# EAGLE board Display4s (EAGLE 9.6.2)
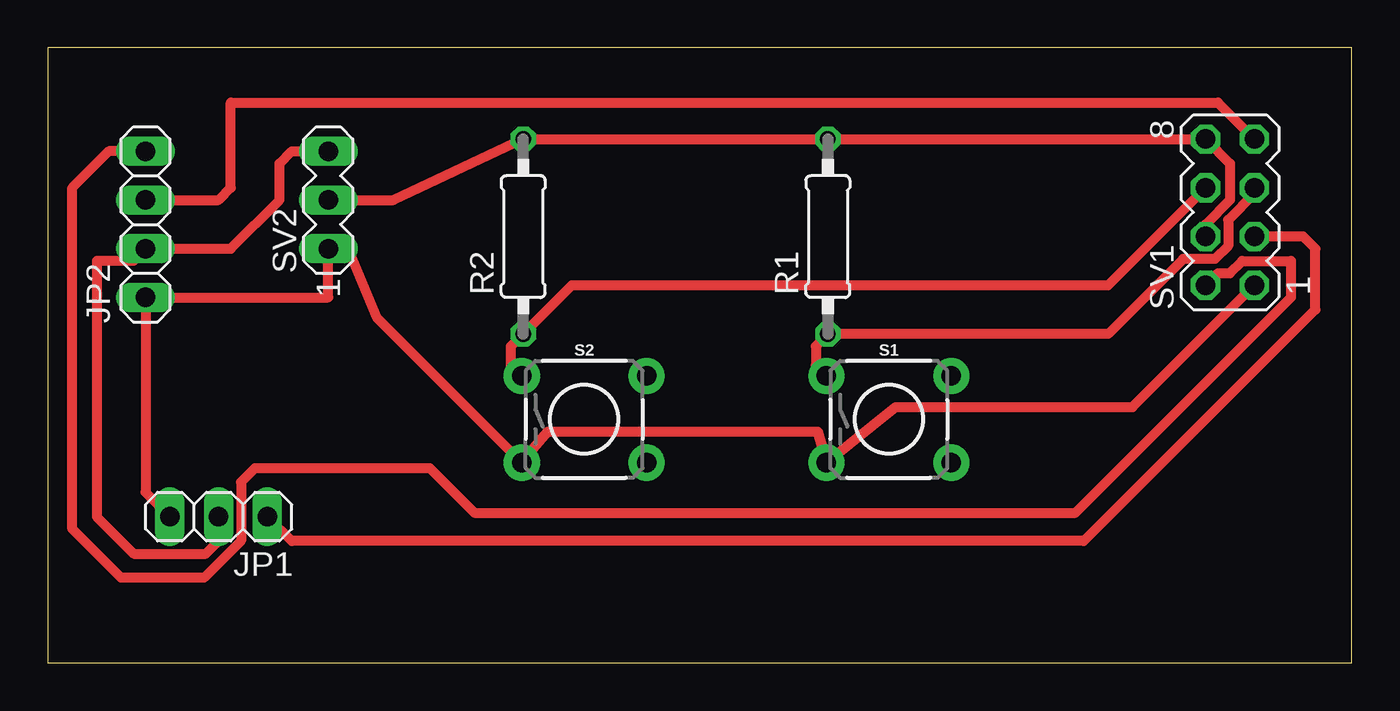
[diagram p0: board, top side]

Size 67.93 x 32.05 mm. Coordinates in mm from the lower left corner, seen from the top.
Outline: 0,0 67.93,0 67.93,32.05 0,32.05 0,0
Copper layers (1*16): Top 0.035mm / dielectric 1.5mm / Bottom 0.035mm
Design rules "default": minimum track width 6mil, minimum drill 0.35mm, track to track 6mil, track to pad 6mil, pad to pad 6mil, via to via 6mil, smd to smd 6mil, copper to edge 40mil, drill to drill 6mil, minimum pad ring 10mil, minimum via ring 8mil, stop-mask expansion 4mil, vias tented up to drill 0mil, thermal gap 10mil

## Footprints (pad centres in the part's own frame; a part is rotated, then mirrored left to right if it is on the bottom)
1X03 = drill 1.016 long: 1 -2.54,0; 2 0,0; 3 2.54,0
1X04 = drill 1.016 long: 1 -3.81,0; 2 -1.27,0; 3 1.27,0; 4 3.81,0
0207/10 = drill 0.813 octagon: 1 -5.08,0; 2 5.08,0
TACTILE_SWITCH_PTH_6.0MM = drill 1.016 pad 1.88: 1 -3.251,2.261; 2 3.251,2.261; 3 -3.251,-2.261; 4 3.251,-2.261
MA04-2 = drill 1.016 octagon: 1 -3.81,-1.27; 2 -3.81,1.27; 3 -1.27,-1.27; 4 -1.27,1.27; 5 1.27,-1.27; 6 1.27,1.27; 7 3.81,-1.27; 8 3.81,1.27
MA03-1 = drill 1.016 long: 1 -2.54,0; 2 0,0; 3 2.54,0

## Placement (x,y rotation side)
JP1  [1X03]  8.89,7.62 180 top
JP2  [1X04]  5.08,22.86 90 top
R1  [0207/10]  40.64,22.22 90 top
R2  [0207/10]  24.77,22.22 90 top
S1  SPST-PTH-6.0MM  [TACTILE_SWITCH_PTH_6.0MM]  43.81,12.7 0 top
S2  SPST-PTH-6.0MM  [TACTILE_SWITCH_PTH_6.0MM]  27.94,12.7 0 top
SV1  [MA04-2]  61.59,23.5 90 top
SV2  [MA03-1]  14.61,24.13 90 top

## Library data of the parts
JP1 JP2 = pinhead
R1 R2 = rcl; SPICEPREFIX: R
S1 S2 = SparkFun-Switches; PROD_ID: SWCH-08441; SF_SKU: COM-00097
SV1 SV2 = con-lstb; OC_FARNELL: unknown; OC_NEWARK: unknown

## Nets
3V3: R1.2 R2.2 SV1.4 SV1.8 SV2.2
5V: JP1.2 JP2.2 SV2.3
FLASH: R1.1 S1.1 SV1.5
GND: JP1.3 JP2.1 S1.3 S2.3 SV1.1 SV2.1
RESET: R2.1 S2.1 SV1.6
RX: JP2.3 SV1.7
SING: JP1.1 SV1.3
TX: JP2.4 SV1.2

## Tracks (layer width: path | path; a pad name or v marks a point on that pad's centre or on a via)
3V3
  Top 0.508: SV2.2 18.02,24.13 R2.2 R1.2 SV1.8 61.59,26.04 61.59,24.13 60.32,22.86 SV1.4
5V
  Top 0.508: SV2.3 12.7,26.67 12.06,26.04 12.06,24.13 9.53,21.59 JP2.2 4.45,20.96 2.54,20.96 2.54,7.62 4.47,5.69 8.23,5.69 8.89,6.35 JP1.2
FLASH
  Top 0.508: S1.1 40,15.52 40,16.51 R1.1 55.24,17.14 59.16,21.06 60.81,21.06 61.49,21.74 61.49,23.09 62.86,24.47 SV1.5
GND
  Top 0.508: JP1.3 5.08,8.89 JP2.1 14.61,19.05 SV2.1 15.65,21.59 17.16,17.97 S2.3 26.06,12.06 40.11,12.06 S1.3 44.17,13.33 56.52,13.33 SV1.1
RESET
  Top 0.508: S2.1 24.62,14.96 24.13,15.45 24.13,16.51 R2.1 27.31,19.68 55.24,19.68 SV1.6
RX
  Top 0.508: SV1.7 60.96,29.21 9.53,29.21 9.53,24.76 8.89,24.13 JP2.3
SING
  Top 0.508: JP1.1 12.7,6.35 53.98,6.35 66.04,18.41 66.04,21.59 65.41,22.22 SV1.3
TX
  Top 0.508: SV1.2 60.96,20.32 61.59,20.32 62.23,20.96 64.77,20.96 64.77,19.05 53.54,7.82 22.23,7.82 19.89,10.16 10.79,10.16 10.06,9.42 10.06,6.37 8.13,4.44 3.81,4.44 1.27,6.98 1.27,24.76 3.17,26.67 JP2.4